# Altium PCB finalproject_pcb.PcbDoc
Units mil, origin at the board's own origin, x right, y up, seen from the top; angles counter-clockwise.
Board outline 6000 x 4000 mil, 2 copper layers (Top Layer, Bottom Layer); 62 components, 55 nets, 331 pads, 0 vias.
Unrouted connection lines stored in the file: 180.
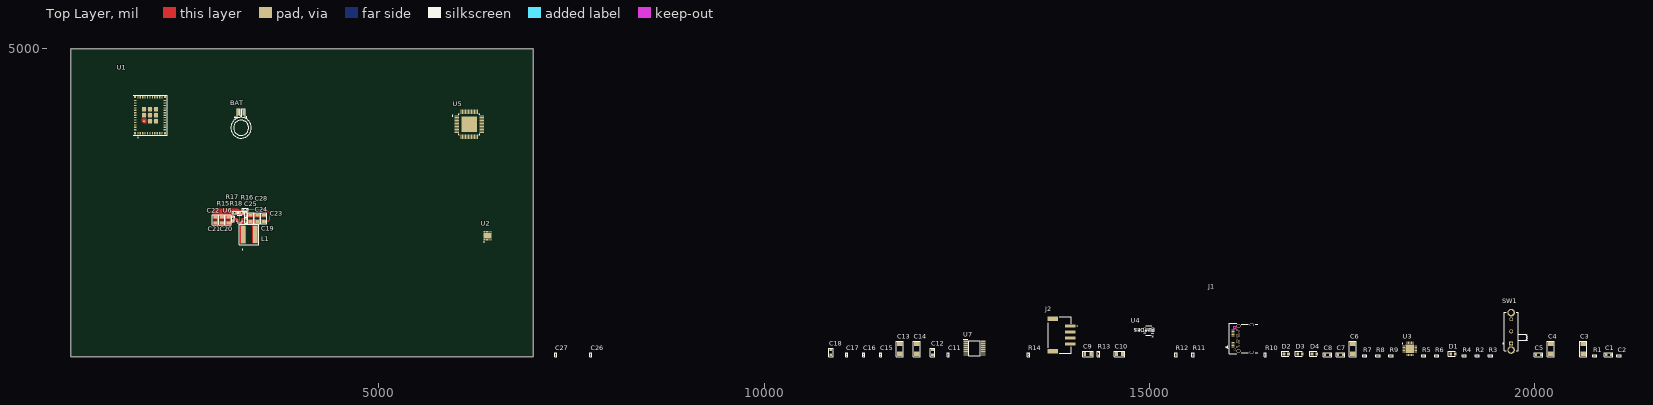
[diagram p0: Top Layer view]
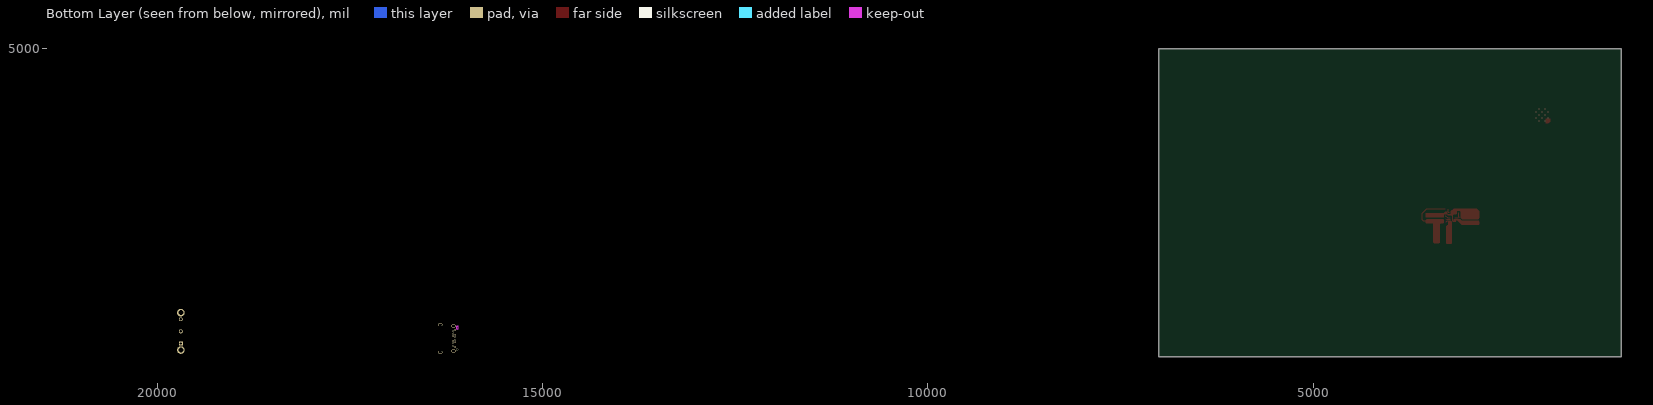
[diagram p1: Bottom Layer view, seen from below]

## Layer stack, top to bottom
Top Solder: solder mask 0.4, Solder Resist, Dk 3.5
Top Layer: signal copper 1.4
Dielectric 1: dielectric 12.6, FR-4, Dk 4.8
Bottom Layer: signal copper 1.4
Bottom Solder: solder mask 0.4, Solder Resist, Dk 3.5

## Board outline
1000,1000 7000,1000 7000,5000 1000,5000

## Design rules (kind name [scope] priority, off if disabled: settings)
BoardOutlineClearance [All] p1: gap=7.87 ignorepadtopadclearanceinfootprint=FALSE
Clearance ClearanceMidLayer1 [OnLayer('Mid Layer 1') Or IsVia Or IsThruPin vs OnLayer('Mid Layer 1')] p1: gap=4 ignorepadtopadclearanceinfootprint=FALSE except(5: Arc-Via Track-Via SMDPad-Via THPad-Via Via-Via Via-Fill Via-Poly Via-Region Via-Text; 9.84: Arc-Hole Track-Hole SMDPad-Hole THPad-Hole Via-Hole Fill-Hole Poly-Hole Region-Hole Text-Hole)
Clearance ClearanceTopLayer [OnLayer('Top Layer') Or IsVia Or IsThruPin vs OnLayer('Top Layer') Or IsVia Or IsThruPin] p2: gap=8 ignorepadtopadclearanceinfootprint=TRUE except(9.84: Arc-Hole Track-Hole SMDPad-Hole THPad-Hole Via-Hole Fill-Hole Poly-Hole Region-Hole Text-Hole)
Clearance ClearanceBottomLayer [OnLayer('Bottom Layer') Or IsVia Or IsThruPin vs OnLayer('Bottom Layer') Or IsVia Or IsThruPin] p3: gap=8 ignorepadtopadclearanceinfootprint=FALSE except(9.84: Arc-Hole Track-Hole SMDPad-Hole THPad-Hole Via-Hole Fill-Hole Poly-Hole Region-Hole Text-Hole)
Clearance ClearanceMidLayer2 [OnLayer('Mid Layer 2') Or IsVia Or IsThruPin vs OnLayer('Mid Layer 2')] p4: gap=4 ignorepadtopadclearanceinfootprint=FALSE except(5: Arc-Via Track-Via SMDPad-Via THPad-Via Via-Via Via-Fill Via-Poly Via-Region Via-Text; 9.84: Arc-Hole Track-Hole SMDPad-Hole THPad-Hole Via-Hole Fill-Hole Poly-Hole Region-Hole Text-Hole)
ComponentClearance [All] p1: gap=4 collisioncheckmode=3 verticalgap=4 showdistances=TRUE
DiffPairsRouting [All] p1: maxlimit=8 minlimit=8 mostfreqgap=8 toplayer_minwidth=8 toplayer_maxwidth=71497.94 toplayer_prefwidth=8 bottomlayer_minwidth=8 bottomlayer_maxwidth=71497.94 bottomlayer_prefwidth=8 maxuncoupledlength=500
Height [All] p1: minheight=0 maxheight=71497.94 prefheight=500
HoleSize [All] p1: absolutevalues=TRUE maxlimit=248.03 minlimit=7.87 maxpercent=80.000 minpercent=20.000
HoleToHoleClearance [All] p1: gap=9.84 allowstackedmicrovias=FALSE
MinimumAnnularRing [All] p1: minimumring=3
MinimumSolderMaskSliver [All] p1: minsoldermaskwidth=0
PlaneClearance PlaneClearanceMidLayer1 [OnLayer('Mid Layer 1')] p1: clearance=4
PlaneClearance PlaneClearanceMidLayer2 [OnLayer('Mid Layer 2')] p2: clearance=4
PlaneClearance PlaneClearanceTopLayer [OnLayer('Top Layer')] p3: clearance=8
PlaneClearance PlaneClearanceBottomLayer [OnLayer('Bottom Layer')] p4: clearance=8
PlaneConnect PlaneConnectPowerPads [InPadClass('PowerPads')] p1: planeconnectstyle=Direct reliefexpansion=20 reliefentries=4 reliefconductorwidth=10 reliefairgap=10
PlaneConnect PlaneConnectTopLayer [OnLayer('Top Layer')] p2: pad.planeconnectstyle=Relief pad.reliefexpansion=11.81 pad.reliefentries=4 pad.reliefconductorwidth=8 pad.reliefairgap=8 via.planeconnectstyle=Direct via.reliefexpansion=11.81 via.reliefentries=4 via.reliefconductorwidth=5 via.reliefairgap=5
PlaneConnect PlaneConnectBottomLayer [OnLayer('Bottom Layer')] p3: pad.planeconnectstyle=Relief pad.reliefexpansion=11.81 pad.reliefentries=4 pad.reliefconductorwidth=8 pad.reliefairgap=8 via.planeconnectstyle=Direct via.reliefexpansion=11.81 via.reliefentries=4 via.reliefconductorwidth=5 via.reliefairgap=5
PlaneConnect PlaneConnectMidLayer1 [OnLayer('Mid Layer 1')] p4: pad.planeconnectstyle=Relief pad.reliefexpansion=11.81 pad.reliefentries=4 pad.reliefconductorwidth=4 pad.reliefairgap=4 via.planeconnectstyle=Direct via.reliefexpansion=11.81 via.reliefentries=4 via.reliefconductorwidth=5 via.reliefairgap=5
PlaneConnect PlaneConnectMidLayer2 [OnLayer('Mid Layer 2')] p5: pad.planeconnectstyle=Relief pad.reliefexpansion=11.81 pad.reliefentries=4 pad.reliefconductorwidth=4 pad.reliefairgap=4 via.planeconnectstyle=Direct via.reliefexpansion=11.81 via.reliefentries=4 via.reliefconductorwidth=5 via.reliefairgap=5
PolygonConnect PolygonConnectPowerPads [All vs (InPadClass('PowerPads'))] p1: connectstyle=Direct reliefconductorwidth=10 reliefentries=4 polygonreliefangle="90 Angle" airgapwidth=10
PolygonConnect PolygonConnectMidLayer1 [OnLayer('Mid Layer 1') vs OnLayer('Mid Layer 1')] p2: thpad.connectstyle=Relief thpad.reliefconductorwidth=4 thpad.reliefentries=4 thpad.polygonreliefangle="90 Angle" thpad.airgapwidth=4 smdpad.connectstyle=Relief smdpad.reliefconductorwidth=4 smdpad.reliefentries=4 smdpad.polygonreliefangle="90 Angle" smdpad.airgapwidth=4 via.connectstyle=Direct via.reliefconductorwidth=5 via.reliefentries=4 via.polygonreliefangle="90 Angle" via.airgapwidth=5
PolygonConnect PolygonConnectMidLayer2 [OnLayer('Mid Layer 2') vs OnLayer('Mid Layer 2')] p3: thpad.connectstyle=Relief thpad.reliefconductorwidth=4 thpad.reliefentries=4 thpad.polygonreliefangle="90 Angle" thpad.airgapwidth=4 smdpad.connectstyle=Relief smdpad.reliefconductorwidth=4 smdpad.reliefentries=4 smdpad.polygonreliefangle="90 Angle" smdpad.airgapwidth=4 via.connectstyle=Direct via.reliefconductorwidth=5 via.reliefentries=4 via.polygonreliefangle="90 Angle" via.airgapwidth=5
PolygonConnect PolygonConnectTopLayer [OnLayer('Top Layer') vs OnLayer('Top Layer')] p4: thpad.connectstyle=Relief thpad.reliefconductorwidth=8 thpad.reliefentries=4 thpad.polygonreliefangle="90 Angle" thpad.airgapwidth=8 smdpad.connectstyle=Relief smdpad.reliefconductorwidth=8 smdpad.reliefentries=4 smdpad.polygonreliefangle="90 Angle" smdpad.airgapwidth=8 via.connectstyle=Direct via.reliefconductorwidth=5 via.reliefentries=4 via.polygonreliefangle="90 Angle" via.airgapwidth=5
PolygonConnect PolygonConnectBottomLayer [OnLayer('Bottom Layer') vs OnLayer('Bottom Layer')] p5: thpad.connectstyle=Relief thpad.reliefconductorwidth=8 thpad.reliefentries=4 thpad.polygonreliefangle="90 Angle" thpad.airgapwidth=8 smdpad.connectstyle=Relief smdpad.reliefconductorwidth=8 smdpad.reliefentries=4 smdpad.polygonreliefangle="90 Angle" smdpad.airgapwidth=8 via.connectstyle=Direct via.reliefconductorwidth=5 via.reliefentries=4 via.polygonreliefangle="90 Angle" via.airgapwidth=5
RoutingVias [All] p1: holewidth=7.87 width=17.72 viastyle="Through Hole" minholewidth=7.87 minwidth=17.72 maxholewidth=248.03 maxwidth=257.87
SilkToSilkClearance [All] p1: silktosilkclearance=0
SilkToSolderMaskClearance [IsPad] p1: minsilkscreentomaskgap=4 clearancetoexposedcopper=TRUE
SolderMaskExpansion [All] p1: expansion=2.95 istentingtop=FALSE
SupplyNets "Schematic Supply Nets" [InNet('GND')] p1: voltage=0.000
Width [All] p1: maxlimit=71497.94 minlimit=8 preferedwidth=8 minimp=50.000000 maximp=50.000000 favimp=50.000000
20 further rules are at their usual default settings.

## Components (designator, comment, footprint, x,y, rotation, side; value= is the part's Value field where it differs from the comment)
BAT "MECH_BT" BT_MS621FE-FL11E 3210,3975 r90 top
C1 "CAP_0603" CAP_0603 20960,1030 r0 top value=4.7uF
C2 "CAP_0201" CAP_0201 21095,1015 r0 top value=100nF
C3 "CAP_1206" CAP_1206 20630,1105 r90 top value=10uF
C4 "CAP_1206" CAP_1206 20210,1105 r90 top value=10uF
C5 "CAP_0603" CAP_0603 20050,1030 r0 top value=1uF
C6 "CAP_1206" CAP_1206 17640,1105 r90 top value=10uF
C7 "CAP_0603" CAP_0603 17480,1030 r0 top value=4.7uF
C8 "CAP_0603" CAP_0603 17310,1030 r0 top value=4.7uF
C9 "CAP_0805" CAP_0805 14200,1040 r0 top value=10uF
C10 "CAP_0805" CAP_0805 14610,1040 r0 top value=10uF
C11 "CAP_0201" CAP_0201 12390,1030 r90 top value=100nF
C12 "CAP_0603" CAP_0603 12185,1060 r90 top value=0.1uF
C13 "CAP_1206" CAP_1206 11760,1105 r90 top value=22uF
C14 "CAP_1206" CAP_1206 11980,1105 r90 top value=22uF
C15 "CAP_0201" CAP_0201 11510,1030 r90 top value=22nf
C16 "CAP_0201" CAP_0201 11290,1030 r90 top value=100nF
C17 "CAP_0201" CAP_0201 11070,1030 r90 top value=100nF
C18 "CAP_0603" CAP_0603 10865,1060 r90 top value=4.7uF
C19 "CAP_0402" CAP_0402 3275,2770 r90 top value=0.1uF
C20 "CAP_0805" CAP_0805 3045,2780 r270 top value=10uF
C21 "CAP_0805" CAP_0805 2960,2780 r270 top value=10uF
C22 "CAP_0805" CAP_0805 2875,2780 r270 top value=0.1uF
C23 "CAP_0805" CAP_0805 3505,2800 r270 top value=22uF
C24 "CAP_0805" CAP_0805 3420,2800 r270 top value=22uF
C25 "CAP_0805" CAP_0805 3335,2800 r270 top value=0.1uF
C26 "CAP_0201" CAP_0201 7750,1030 r90 top value=100nF
C27 "CAP_0201" CAP_0201 7295,1030 r90 top value=100nF
C28 "CAP_0402" CAP_0402 3275,2850.32 r270 top value=33nF
D1 "KT-0603R" LEDC1608X70N 18940,1040 r0 top
D2 "KT-0603R" LEDC1608X70N 16775,1040 r0 top
D3 "KT-0603R" LEDC1608X70N 16955,1040 r0 top
D4 "KT-0603R" LEDC1608X70N 17140,1040 r0 top
J1 "2171830001" MOLEX_2171830001 16405,1240 r90 top
J2 "S4B-PH-SM4-TB__LF__SN_" S4BPHSM4TBLFSN 13835,1285 r90 top
L1 "6.8uH" 74439346068 3315,2590 r90 top
R1 "RES_0201" RES_0201 20780,1015 r0 top value=5m
R2 "RES_0201" RES_0201 19255,1015 r0 top value=5.1k
R3 "RES_0201" RES_0201 19425,1015 r0 top value=5.1k
R4 "RES_0201" RES_0201 19085,1015 r0 top value=220
R5 "RES_0201" RES_0201 18560,1015 r0 top value=66k
R6 "RES_0201" RES_0201 18730,1015 r0 top value=39k
R7 "RES_0201" RES_0201 17795,1015 r0 top value=220
R8 "RES_0201" RES_0201 17965,1015 r0 top value=220
R9 "RES_0201" RES_0201 18135,1015 r0 top value=220
R10 "RES_0201" RES_0201 16505,1030 r90 top value=10k
R11 "RES_0201" RES_0201 15565,1030 r90 top value=10k
R12 "RES_0201" RES_0201 15345,1030 r90 top value=20k
R13 "RES_0402" RES_0402 14340,1040 r90 top value=10k
R14 "RES_0201" RES_0201 13430,1030 r90 top value=9.1k
R15 "RES_0402" RES_0402 3105,2795 r270 top value=511k
R16 "RES_0402" RES_0402 3265,2915 r0 top value=53.6k
R17 "RES_0402" RES_0402 3130,2875 r180 top value=88.7k
R18 "RES_0402" RES_0402 3215.32,2875 r0 top value=10.2k
SW1 "SLW-1277545-3A-RA-N-D" SLW12775453ARAND 19695,1175 r90 top
U1 "ESP32-H2-MINI-1-H2" MODULE_ESP32-H2-MINI-1-H2 1921.61,4138.5 r90 top
U2 "AP33771CFBZ-13-FA01" AP33771CFBZ13FA01 6409.25,2572.83 r0 top
U3 "MCP73871-1AAI_ML" QFN50P400X400X100-21N-D 18380,1105 r0 top
U4 "XC6220B331MR-G" SOT-25_TOR 14990,1345 r180 top
U5 "TMC2130-TA" QFP50P900X900X120-49N 6170.83,4021.1 r0 top
U6 "TPS62933DRLR" SOT-5X3-8_DRL_TEX 3190,2790 r0 top
U7 "MT6835" SOP65P640X120-16N 12730,1115 r0 top (schematic designator B1)

## Footprints (in the part's own frame and the unit in brackets; to place one, negate y for a bottom-side part, rotate by r counter-clockwise, add the part's x,y. Pads: shape width x height; smd on the part's side, far side on the other; paste and mask are expansions set on the pad)
74439346068 [mm]
  rect 5.5x1.45 smd: 1(0,2) 2(0,-2)
  silkscreen extent -5,-3.22 3.32,3.25, body extent -3.32,-3.22 3.32,3.22, height 5.2
AP33771CFBZ13FA01 [mm]
  rect 0.27x0.45 smd: 1(-1.2,-1.325) 2(-0.8,-1.325) 3(-0.4,-1.325) 4(0,-1.325) 5(0.4,-1.325) 6(0.8,-1.325) 7(1.2,-1.325) 8(1.2,1.325) 9(0.8,1.325) 10(0.4,1.325) 11(0,1.325) 12(-0.4,1.325) 13(-0.8,1.325) 14(-1.2,1.325)
  rect 2.7x1.8 smd: 15(0,0)
  silkscreen extent -1.25,-2.1 -1.15,-2, body extent -1.51,-1.51 1.49,1.49, height 0.75
BT_MS621FE-FL11E [mm]
  rect 2x0.7 smd: 1(4.993,0.75) 2(4.993,-0.75)
  silkscreen extent -3.4,-3.4 6.2,3.4, body extent -3.4,-3.4 5.89,3.4, height 2.85
CAP_0201 [mm]
  rect 0.35x0.3 smd mask+0.05: 1(-0.3,0) 2(0.3,0)
  silkscreen extent -0.7,-0.35 0.7,0.35, body extent -0.3,-0.15 0.3,0.15, height 0.33
CAP_0402 [mm]
  rect 0.55x0.5 smd mask+0.05: 1(-0.5,0) 2(0.5,0)
  silkscreen extent -0.95,-0.45 0.95,0.45, body extent -0.5,-0.25 0.5,0.25, height 0.55
CAP_0603 [mm]
  rect 0.7x0.9 smd mask+0.05: 1(-0.8,0) 2(0.8,0)
  silkscreen extent -1.4,-0.7 1.4,0.7, body extent -0.8,-0.4 0.8,0.4, height 0.9
CAP_0805 [mm]
  rect 0.95x1.3 smd mask+0.05: 1(-1,0) 2(1,0)
  silkscreen extent -1.75,-0.95 1.75,0.95, body extent -1,-0.63 1,0.63, height 1.35
CAP_1206 [mm]
  rect 1.4x1.8 smd mask+0.05: 1(-1.6,0) 2(1.6,0)
  silkscreen extent -2.55,-1.15 2.55,1.15, body extent -1.6,-0.8 1.6,0.8, height 1.4
LEDC1608X70N [mm]
  rect 0.9x0.95 smd: 1(-0.75,0) 2(0.75,0)
  silkscreen extent -1.55,-0.82 0.75,0.82, body extent -0.8,-0.4 0.8,0.4, height 0.53
MODULE_ESP32-H2-MINI-1-H2 [mm]
  rect 0.8x0.4 smd: 1(-5.9,1.3) 2(-5.9,0.5) 3(-5.9,-0.3) 4(-5.9,-1.1) 5(-5.9,-1.9) 6(-5.9,-2.7) 7(-5.9,-3.5) 8(-5.9,-4.3) 9(-5.9,-5.1) 10(-5.9,-5.9) 11(-5.9,-6.7) 25(5.9,-6.7) 26(5.9,-5.9) 27(5.9,-5.1) 28(5.9,-4.3) 29(5.9,-3.5) 30(5.9,-2.7) 31(5.9,-1.9) 32(5.9,-1.1) 33(5.9,-0.3) 34(5.9,0.5) 35(5.9,1.3)
  rect 0.4x0.8 smd: 12(-4.8,-7.6) 13(-4,-7.6) 14(-3.2,-7.6) 15(-2.4,-7.6) 16(-1.6,-7.6) 17(-0.8,-7.6) 18(0,-7.6) 19(0.8,-7.6) 20(1.6,-7.6) 21(2.4,-7.6) 22(3.2,-7.6) 23(4,-7.6) 24(4.8,-7.6) 36(4.8,2.2) 37(4,2.2) 38(3.2,2.2) 39(2.4,2.2) 40(1.6,2.2) 41(0.8,2.2) 42(0,2.2) 43(-0.8,2.2) 44(-1.6,2.2) 45(-2.4,2.2) 46(-3.2,2.2) 47(-4,2.2) 48(-4.8,2.2)
  rect 1.45x1.45 smd: 49_1(0,-2.7) 49_3(0,-0.725) 49_4(1.975,-0.725) 49_5(-1.975,-2.7) 49_6(1.975,-2.7) 49_7(-1.975,-4.675) 49_8(0,-4.675) 49_9(1.975,-4.675)
  rect 0.5x0.5 smd paste-1 mask+0: 49_2(-1.975,-0.725)
  rect 0.7x0.7 smd: 50(5.95,2.25) 51(5.95,-7.65) 52(-5.95,-7.65) 53(-5.95,2.25)
  round 0.3 hole 0.2 mask+0: 54(-0.988,-0.725) 55(0.988,-0.725) 56(-1.975,-1.713) 57(0,-1.713) 58(1.975,-1.713) 59(-0.988,-2.7) 60(0.988,-2.7) 61(-1.975,-3.688) 62(0,-3.688) 63(1.975,-3.688) 64(-0.988,-4.675) 65(0.988,-4.675)
  Top Layer region: -1.25,-1.45 -2.7,-1.45 -2.7,-0.6 -2.1,0 -1.25,0
  silkscreen extent -7.45,-8.35 6.65,2.9, body extent -6.6,-8.3 6.6,8.3, height 2.55
MOLEX_2171830001 [mm]
  rect 0.298x0.9 smd mask+0.064: A1(-2.75,8.15) A2(-2.25,8.15) A3(-1.75,8.15) A4(-1.25,8.15) A5(-0.75,8.15) A6(-0.25,8.15) A7(0.25,8.15) A8(0.75,8.15) A9(1.25,8.15) A10(1.75,8.15) A11(2.25,8.15) A12(2.75,8.15)
  round 0.59 hole 0.4 mask+0.064: B1(2.8,6.94) B2(2.4,6.24) B3(1.6,6.24) B4(1.2,6.94) B5(0.8,6.24) B6(0.4,6.94) B7(-0.4,6.94) B8(-0.8,6.24) B9(-1.2,6.94) B10(-1.6,6.24) B11(-2.4,6.24) B12(-2.8,6.94)
  oval 0.9x1.5 hole 0.5 slot 1.1 at 90 deg mask+0.064: SH1(-4.49,1.95) SH2(4.49,1.95) SH3(-4.13,6.34) SH4(4.13,6.34)
  round 0.65 hole 0.65 unplated mask+0.064: ""(-3.6,7.59)
  Keep-Out Layer board cut-out: 3.75,7.265 3.45,7.265 3.433,7.265 3.416,7.267 3.399,7.269 3.382,7.272 3.366,7.276 3.35,7.281 3.334,7.287 3.318,7.293 3.302,7.3 3.288,7.309 3.273,7.317 3.259,7.327 3.245,7.337 3.233,7.348 3.22,7.36 3.208,7.373 3.197,7.385 3.187,7.399 3.177,7.413 3.169,7.428 3.16,7.442 3.153,7.458 3.147,7.474 3.141,7.49 3.136,7.506 3.132,7.522 3.129,7.539 3.127,7.556 3.125,7.573 3.125,7.59 3.125,7.607 3.127,7.624 3.129,7.641 3.132,7.658 3.136,7.674 3.141,7.69 3.147,7.706 3.153,7.722 3.16,7.738 3.169,7.752 3.177,7.767 3.187,7.781 3.197,7.795 3.208,7.807 3.22,7.82 3.233,7.832 3.245,7.843 3.259,7.853 3.273,7.863 3.288,7.871 3.302,7.88 3.318,7.887 3.334,7.893 3.35,7.899 3.366,7.904 3.382,7.908 3.399,7.911 3.416,7.913 3.433,7.915 3.45,7.915 3.75,7.915 3.767,7.915 3.784,7.913 3.801,7.911 3.818,7.908 3.834,7.904 3.85,7.899 3.866,7.893 3.882,7.887 3.898,7.88 3.913,7.871 3.927,7.863 3.941,7.853 3.955,7.843 3.967,7.832 3.98,7.82 3.992,7.807 4.003,7.795 4.013,7.781 4.023,7.767 4.031,7.752 4.04,7.738 4.047,7.722 4.053,7.706 4.059,7.69 4.064,7.674 4.068,7.658 4.071,7.641 4.073,7.624 4.075,7.607 4.075,7.59 4.075,7.573 4.073,7.556 4.071,7.539 4.068,7.522 4.064,7.506 4.059,7.49 4.053,7.474 4.047,7.458 4.04,7.442 4.031,7.428 4.023,7.413 4.013,7.399 4.003,7.385 3.992,7.373 3.98,7.36 3.967,7.348 3.955,7.337 3.941,7.327 3.927,7.317 3.913,7.309 3.898,7.3 3.882,7.293 3.866,7.287 3.85,7.281 3.834,7.276 3.818,7.272 3.801,7.269 3.784,7.267 3.767,7.265
  silkscreen extent -5.07,0 5.07,10.63, body extent -4.93,-0.74 4.92,9.13, height 2.23
QFN50P400X400X100-21N-D [mm]
  rect 0.8x0.3 smd: 1(-2,1) 2(-2,0.5) 3(-2,0) 4(-2,-0.5) 5(-2,-1) 11(2,-1) 12(2,-0.5) 13(2,0) 14(2,0.5) 15(2,1)
  rect 0.3x0.8 smd: 6(-1,-2) 7(-0.5,-2) 8(0,-2) 9(0.5,-2) 10(1,-2) 16(1,2) 17(0.5,2) 18(0,2) 19(-0.5,2) 20(-1,2)
  rect 2.8x2.8 smd: 21(0,0)
  silkscreen extent -2.52,1.63 -2.27,1.87
QFP50P900X900X120-49N [mm]
  rrect50% 1.47x0.28 smd: 1(-4.17,2.75) 2(-4.17,2.25) 3(-4.17,1.75) 4(-4.17,1.25) 5(-4.17,0.75) 6(-4.17,0.25) 7(-4.17,-0.25) 8(-4.17,-0.75) 9(-4.17,-1.25) 10(-4.17,-1.75) 11(-4.17,-2.25) 12(-4.17,-2.75) 25(4.17,-2.75) 26(4.17,-2.25) 27(4.17,-1.75) 28(4.17,-1.25) 29(4.17,-0.75) 30(4.17,-0.25) 31(4.17,0.25) 32(4.17,0.75) 33(4.17,1.25) 34(4.17,1.75) 35(4.17,2.25) 36(4.17,2.75)
  rrect50% 0.28x1.47 smd: 13(-2.75,-4.17) 14(-2.25,-4.17) 15(-1.75,-4.17) 16(-1.25,-4.17) 17(-0.75,-4.17) 18(-0.25,-4.17) 19(0.25,-4.17) 20(0.75,-4.17) 21(1.25,-4.17) 22(1.75,-4.17) 23(2.25,-4.17) 24(2.75,-4.17) 37(2.75,4.17) 38(2.25,4.17) 39(1.75,4.17) 40(1.25,4.17) 41(0.75,4.17) 42(0.25,4.17) 43(-0.25,4.17) 44(-0.75,4.17) 45(-1.25,4.17) 46(-1.75,4.17) 47(-2.25,4.17) 48(-2.75,4.17)
  rect 5x5 smd paste-3: 49(0,0)
  silkscreen extent -5.6,-3.5 3.5,3.5, body extent -4.5,-4.5 4.5,4.5, height 1.2
RES_0201 [mm]
  rect 0.35x0.3 smd mask+0.05: 1(-0.3,0) 2(0.3,0)
  silkscreen extent -0.7,-0.35 0.7,0.35, body extent -0.3,-0.15 0.3,0.15, height 0.23
RES_0402 [mm]
  rect 0.55x0.5 smd mask+0.05: 1(-0.5,0) 2(0.5,0)
  silkscreen extent -0.95,-0.45 0.95,0.45, body extent -0.5,-0.25 0.5,0.25, height 0.35
S4BPHSM4TBLFSN [mm]
  rect 1x3.5 smd: 1(3,-3.45) 2(1,-3.45) 3(-1,-3.45) 4(-3,-3.45)
  rect 1.5x3.4 smd: 5(5.35,2.3) 6(-5.35,2.3)
  silkscreen extent -5.95,-5.8 5.95,3.8
SLW12775453ARAND [mm]
  rect 1.3x1.3 hole 0.8: 1(0,0)
  round 1.3 hole 0.8: 2(4,0) 3(8,0)
  round 2.49 hole 1.66: 4(-2.15,0) 5(10.15,0)
  silkscreen extent -2.35,-5.25 10.35,2.8
SOP65P640X120-16N [mm]
  rect 1.475x0.45 smd: 1(-2.938,2.275) 2(-2.938,1.625) 3(-2.938,0.975) 4(-2.938,0.325) 5(-2.938,-0.325) 6(-2.938,-0.975) 7(-2.938,-1.625) 8(-2.938,-2.275) 9(2.938,-2.275) 10(2.938,-1.625) 11(2.938,-0.975) 12(2.938,-0.325) 13(2.938,0.325) 14(2.938,0.975) 15(2.938,1.625) 16(2.938,2.275)
  silkscreen extent -3.67,-2.5 1.85,2.85, body extent -3.2,-2.5 3.2,2.5, height 1.2
SOT-5X3-8_DRL_TEX [mil]
  rect 28x9 smd paste+0 mask+0: 1(-31.5,29.53) 2(-31.5,9.84) 3(-31.5,-9.84) 4(-31.5,-29.53) 5(31.5,-29.53) 6(31.5,-9.84) 7(31.5,9.84) 8(31.5,29.53)
  silkscreen extent -71,-48 30,48, body extent -34,-44 34,44, height 24
SOT-25_TOR [mil]
  rect 36.5x17 smd paste+0 mask+0: 1(-50.75,37.4) 2(-50.75,0) 3(-50.75,-37.4) 4(50.75,-37.4) 5(50.75,37.4)
  silkscreen extent -38,-62 38,62, body extent -55,-57 55,57, height 51

## Part data
BAT: "Battery"
D1 D2 D3 D4: "Red 615~630nm 1.9~2.2V 0603 Light Emitting Diodes (LED) RoHS", Manufacturer_Name="Hubei KENTO Elec", Datasheet Link=https://datasheet.lcsc.com/szlcsc/Hubei-KENTO-Elec-KT-0603R_C2286.pdf, Geometry.Height=0.7mm, Manufacturer_Part_Number=KT-0603R
J1: Package=None, Availability=Unavailable, MF="{'manufacturer': u'Molex'}", MP=2171830001, Price=None
J2: "Connector Header Surface Mount, Right Angle 4 position 0.079\" (2.00mm)", Manufacturer_Name="JST (JAPAN SOLDERLESS TERMINALS)", Manufacturer_Part_Number="S4B-PH-SM4-TB (LF)(SN)", Datasheet Link=https://www.jst-mfg.com/product/pdf/eng/ePH.pdf, Geometry.Height=5.5mm
L1: library part 74439346068, "WE-XHMI SMT Power Inductor Size 6060; L = 6,8 H ; IR = 6,5 A; Isat = 10 A; RDC = 17,6 m", Manufacturer_Name="Wurth Elektronik", Mouser Part Number=710-74439346068, Datasheet Link=https://www.we-online.com/catalog/datasheet/74439346068.pdf, Geometry.Height=6.1mm, Manufacturer_Part_Number=74439346068, Mouser Price/Stock=https://www.mouser.co.uk/ProductDetail/Wurth-Elektronik/74439346068?qs=NSAOzM2zc%2FVj5BeHYKNgfQ%3D%3D
SW1: "12.7 x 7.5 x 4.5 mm, 3 mm Raised Slide Actuator, Right Angle, Through Hole, Slide Switch", Manufacturer_Name="Same Sky", Mouser Part Number=179-SLW12775453ARAND, Datasheet Link=https://www.sameskydevices.com/product/resource/supplyframepdf/slw-1277545-3a-ra-n-d.pdf, Geometry.Height=5mm, Manufacturer_Part_Number=SLW-1277545-3A-RA-N-D, Mouser Price/Stock=https://www.mouser.co.uk/ProductDetail/Same-Sky/SLW-1277545-3A-RA-N-D?qs=IKkN%2F947nfAPsk3r6TcxVw%3D%3D
U1: "802.15.4, Bluetooth Bluetooth v5.3, ZigbeeÂ® Transceiver Module 2.4GHz Integrated, Trace Surface Mount", Package="SMD-53 Espressif Systems", Check_prices=https://www.snapeda.com/parts/ESP32-H2-MINI-1-H2/Espressif+Systems/view-part/?ref=eda, MF="Espressif Systems", MP=ESP32-H2-MINI-1-H2, SnapEDA_Link=https://www.snapeda.com/parts/ESP32-H2-MINI-1-H2/Espressif+Systems/view-part/?ref=snap
U2: "Easy-To-Use USB PD3.1 EPR Sink Controller", Manufacturer_Name="Diodes Incorporated", Mouser Part Number=621-P33771CFBZ13FA01, Arrow Part Number=AP33771CFBZ-13-FA01, Arrow Price/Stock=https://www.arrow.com/en/products/ap33771cfbz-13-fa01/diodes-incorporated?utm_currency=USD&region=nac, Datasheet Link=https://www.diodes.com/datasheet/download/AP33771C.pdf, Geometry.Height=0.8mm, Manufacturer_Part_Number=AP33771CFBZ-13-FA01, Mouser Price/Stock=https://www.mouser.co.uk/ProductDetail/Diodes-Incorporated/AP33771CFBZ-13-FA01?qs=2wMNvWM5ZX7JpCFGcPz6nw%3D%3D
U3: "MICROCHIP - MCP73871-1AAI/ML - USB/AC BATTERY CHARGER WITH POWER PATH MANAGEMENT, 20 QFN 4X4X0.9MM TUBE", Arrow Part Number=MCP73871-1AAI/ML, Manufacturer_Name=Microchip, Mouser Part Number=579-MCP73871-1AAI/ML, Arrow Price/Stock=https://www.arrow.com/en/products/mcp73871-1aaiml/microchip-technology, Datasheet Link=https://www.arrow.com/en/products/mcp73871-1aaiml/microchip-technology, Geometry.Height=1mm, Manufacturer_Part_Number=MCP73871-1AAI/ML, Mouser Price/Stock=https://www.mouser.co.uk/ProductDetail/Microchip-Technology/MCP73871-1AAI-ML?qs=wd5RIQLrsJigic%252B62l919g%3D%3D
U4: "Description", Manufacturer_Name="Torex Semiconductor", Copyright="Copyright (C) 2025 Ultra Librarian. All rights reserved.", Manufacturer_Part_Number=XC6220B331MR-G, RefDes=RefDes, Type=Type
U5: "Bipolar Motor Driver Power MOSFET SPI, Step/Direction 48-TQFP-EP (7x7)", Package=None, Check_prices=https://www.snapeda.com/parts/TMC2130-TA/Trinamic/view-part/?ref=eda, MF="Trinamic Motion", MP=TMC2130-TA, SnapEDA_Link=https://www.snapeda.com/parts/TMC2130-TA/Trinamic/view-part/?ref=snap
U6: "3.8-V to 30-V, 3-A, 200-kHz to 2.2-MHz, low-IQ synchronous buck converter in SOT-583 package 8-SOT-5X3 -40 to 150", Manufacturer_Name="Texas Instruments", Copyright="Copyright (C) 2025 Ultra Librarian. All rights reserved.", Manufacturer_Part_Number=TPS62933DRLR, RefDes=RefDes, Type=Type
U7: "21-Bit High Accuracy Magnetic Angle Encoder IC", Manufacturer_Name=NOVOSENSE, Datasheet Link=https://www.novosns.com/enfiles/MT6835_Rev.1.3.pdf, Geometry.Height=1.2mm, Manufacturer_Part_Number=MT6835

## Nets (pads, with @x,y where several pads share a name; then routed paths per layer and width w, separated by ;. In a path a pad name is that pad's centre, name@x,y a point inside that pad or via, vN(x,y) a via of type N, cw(c..) or ccw(c..) an arc to the next point about the centre after c; other vN are vias at no path point)
3V3: C1.2 C2.1 C10.2 C27.2 U1.3 U1.15 U4.5 U5.10 U5.12
5V: C6.2 C23.2 C24.2 C25.2 L1.2 R7.2 R8.2 R9.2 R16.2 U3.2 U3.4 U3.17 U3.18 U3.19 | length 484
  Top Layer w8: R16.2 3530,2915 3580,2865 3580,2780 3560.63,2760.63 C23.2
5VOUT: C18.2 R14.2 U5.33
A1: J2.4 U5.46
A2: J2.3 U5.42
B1: J2.1 U5.15
B2: J2.2 U5.19
CC1: J1.A5 R2.2 U2.11
CC2: J1.B5 R3.2 U2.10
DIR: U1.20 U5.9
DN1: J1.A7 U2.12
DN2: J1.B7 U1.26
DP1: J1.A6 U2.13
DP2: J1.B6 U1.27
GND: BAT.2 C1.1 C2.2 C3.1 C4.1 C5.1 C6.1 C7.1 C8.1 C9.1 C10.1 C12.1 C13.1 C14.1 C16.1 C17.1 C18.1 C20.1 C21.1 C22.1 C23.1 C24.1 C25.1 C26.1 C27.1 C28.1 D1.1 J1.A1 J1.A12 J1.B1 J1.B12 J1.SH1 J1.SH2 J1.SH3 J1.SH4 R2.1 R3.1 R5.2 R6.2 R10.1 R11.1 R12.1 R17.1 R18.1 U1.1 U1.2 U1.11 U1.14 U1.36 U1.37 U1.38 U1.39 U1.40 U1.41 U1.42 U1.43 U1.44 U1.45 U1.46 U1.47 U1.48 U1.49_1 U1.49_2 U1.49_3 U1.49_4 U1.49_5 U1.49_6 U1.49_7 U1.49_9 U1.50 U1.51 U1.52 U1.53 U2.5 U2.15 U3.3 U3.9 U3.10 U3.11 U3.21 U4.2 U5.1 U5.13 U5.17 U5.24 U5.29 U5.32 U5.44 U5.48 U5.49 U6.4 U7.11 U7.12 U7.13
NetC3_2: C3.2 R1.1 U2.4
NetC5_2: C5.2 U2.14
NetC11_1: C11.1 U5.38
NetC12_2: C12.2 U7.9
NetC15_1: C15.1 U5.37
NetC15_2: C15.2 U5.35
NetC16_2: C16.2 U5.40
NetC19_1: C19.1 L1.1 U6.5 | length 59.6
  Top Layer w8: U6.5@3220,2760 3266.3,2760 3275,2751.3 C19.1
NetC19_2: C19.2 U6.6 | length 59.7
  Top Layer w8: U6.6@3220,2779.69 3265.99,2779.69 3275,2788.7 C19.2
NetC28_2: C28.2 U6.7 | length 66.8
  Top Layer w8: U6.7 3245.2,2799.84 3275,2829.65 C28.2
NetD1_2: D1.2 R4.1
NetD2_1: D2.1 U3.8
NetD2_2: D2.2 R7.1
NetD3_1: D3.1 U3.7
NetD3_2: D3.2 R8.1
NetD4_1: D4.1 U3.6
NetD4_2: D4.2 R9.1
NetR1_2: R1.2 U2.2 U2.3
NetR4_2: R4.2 U2.7
NetR5_1: R5.1 SW1.4
NetR6_1: R6.1 SW1.5
NetR10_2: R10.2 U3.5
NetR11_2: R11.2 U3.13
NetR12_2: R12.2 U3.12
NetR13_1: R13.1 U4.3
NetR14_1: R14.1 U5.30
NetR15_1: R15.1 R17.2 U6.2 | length 122.7
  Top Layer w8: R17.2 3107.66,2872.34 3107.66,2817.34 R15.1 3105,2813.7 3118.86,2799.84 U6.2
NetR16_1: R16.1 R18.2 U6.8 | length 44.8
  Top Layer w8: R18.2 3235.98,2875 3245.32,2884.33 R16.1
NetSW1_2: SW1.2 U2.8 U2.9
NetU1_4,7,17,28,29,32,33,34,35: U1.4 U1.7 U1.17 U1.28 U1.29 U1.32 U1.33 U1.34 U1.35
SPI_CS0: U1.10 U7.8
SPI_CS3: U1.25 U5.3
SPI_MISO: U1.9 U5.7 U7.5
SPI_MOSI: U1.19 U5.5 U7.6
SPI_SCK: U1.18 U5.4 U7.7
STEP: U1.21 U5.8
VBAT: BAT.1 C8.2 U3.14 U3.15 U3.16
VBUS: J1.A4 J1.A9
VIN: C4.2 C11.2 C13.2 C14.2 C17.2 C20.2 C21.2 C22.2 C26.2 R15.2 U2.1 U5.21 U5.39 U6.3
VREG: C7.2 C9.2 R13.2 U3.1 U3.20 U4.1
pads on no net: J1. J1.A2 J1.A3 J1.A8 J1.A10 J1.A11 J1.B2 J1.B3 J1.B4 J1.B8 J1.B9 J1.B10 J1.B11 J2.5 J2.6 SW1.1 SW1.3 U1.5 U1.6 U1.8 U1.12 U1.13 U1.16 U1.22 U1.23 U1.24 U1.30 U1.31 U1.49_8 U1.54 U1.55 U1.56 U1.57 U1.58 U1.59 U1.60 U1.61 U1.62 U1.63 U1.64 U1.65 U2.6 U4.4 U5.2 U5.6 U5.11 U5.14 U5.16 U5.18 U5.20 U5.22 U5.23 U5.25 U5.26 U5.27 U5.28 U5.31 U5.34 U5.36 U5.41 U5.43 U5.45 U5.47 U6.1 U7.1 U7.2 U7.3 U7.4 U7.10 U7.14 U7.15 U7.16

## Other copper
Top Layer:
  region net GND: 3205,2895 3175,2925 2875,2925 2840,2890 2840,2805 2855,2790 3065,2790 3080,2805 3080,2885 3095,2900 3125,2900 3135,2890 3140,2895
  region net 5V: 3365,2475 3355,2485 3355,2725 3345,2735 3310,2735 3305,2740 3305,2780 3310,2785 3525,2785 3535,2775 3535,2740 3530,2735 3440,2735 3440,2490 3425,2475
  region net NetC19_1: 3210,2765 3200,2755 3200,2475 3205,2470 3265,2470 3270,2475 3270,2480 3270,2700 3260,2710 3245,2710 3245,2755 3235,2765
  region net GND: 3285,2885 3305,2865 3535,2865 3540,2860 3540,2820 3535,2815 3305,2815 3300,2820 3300,2845 3295,2850 3280,2850 3280,2880
  region net GND: 3145,2765 3180,2765 3185,2770 3185,2840 3170,2855 3140,2855 3135,2860 3135,2890 3140,2895 3205,2895 3210,2890 3210,2865 3220,2855 3255,2855 3260,2860 3260,2885 3285,2885 3290,2880 3290,2860 3280,2850 3260,2850 3250,2840 3210,2840 3195,2825 3195,2765 3185,2755 3145,2755
  region net VIN: 2850,2765 3070,2765 3090,2785 3175,2785 3175,2775 3130,2775 3070,2715 2850,2715 2840,2725 2840,2755

## Text inside footprints (layer, text, board x,y; h text height)
J1: Mechanical 13 "PCB EDGE" at 16389.25,1463.23 h50 r90; Mechanical 12 "PTH Slot 1.1 +/- 0.05 X 0.5 +/- 0.05" at 15775.61,1006.54 h19.68 r90; Mechanical 12 "NPTH Slot 0.95 +/- 0.05 X 0.65 +/- 0.05" at 15852.58,1006.54 h19.68 r90; Mechanical 12 "PTH Drill 0.4 +/- 0.05" at 15815.61,1006.54 h19.68 r90; Mechanical 12 "NPTH Drill 0.65 +/- 0.05" at 15893.48,1006.54 h19.68 r90
U1: Mechanical 13 "PCB Edge" at 1799.57,4418.03 h35.43 r90
U4: Top Overlay "RefDes" at 15065,1370 h50 r180; Top Overlay "*" at 15063.25,1295.6 h50 r180; Top Overlay "REFDES" at 15077.5,1370 h50 r180; Mechanical 13 "RefDes2" at 15077.5,1370 h50 r180; Mechanical 13 "*" at 15025,1338.6 h50 r180